# Altium PCB Button.PcbDoc
Units mil, origin at the board's own origin, x right, y up, seen from the top; angles counter-clockwise.
Board outline 640.03 x 696.02 mil, 2 copper layers (Top Layer, Bottom Layer); 4 components, 0 nets, 9 pads, 4 vias.
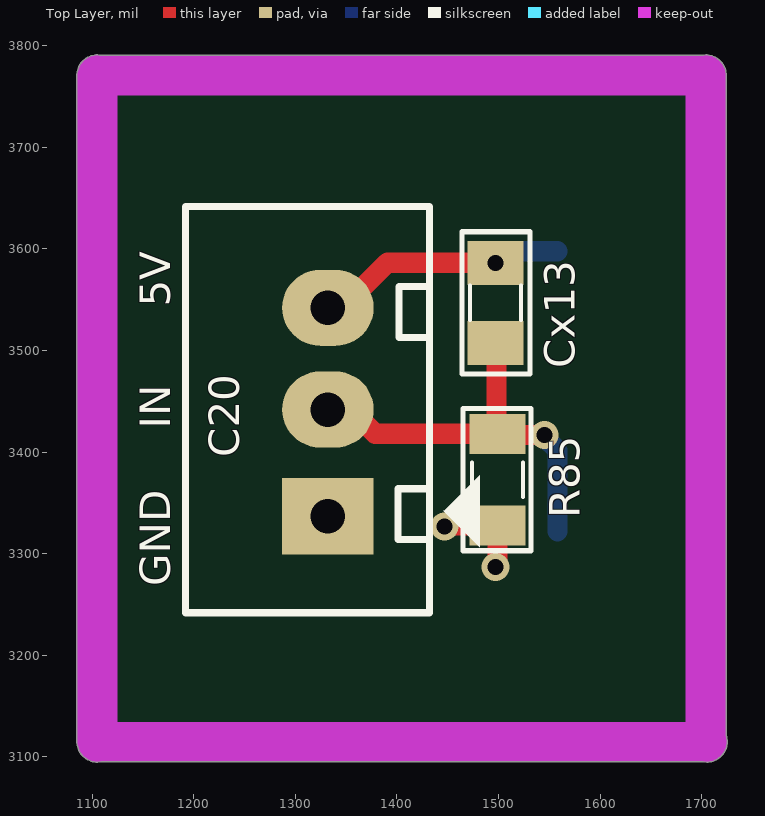
[diagram p0: Top Layer view]
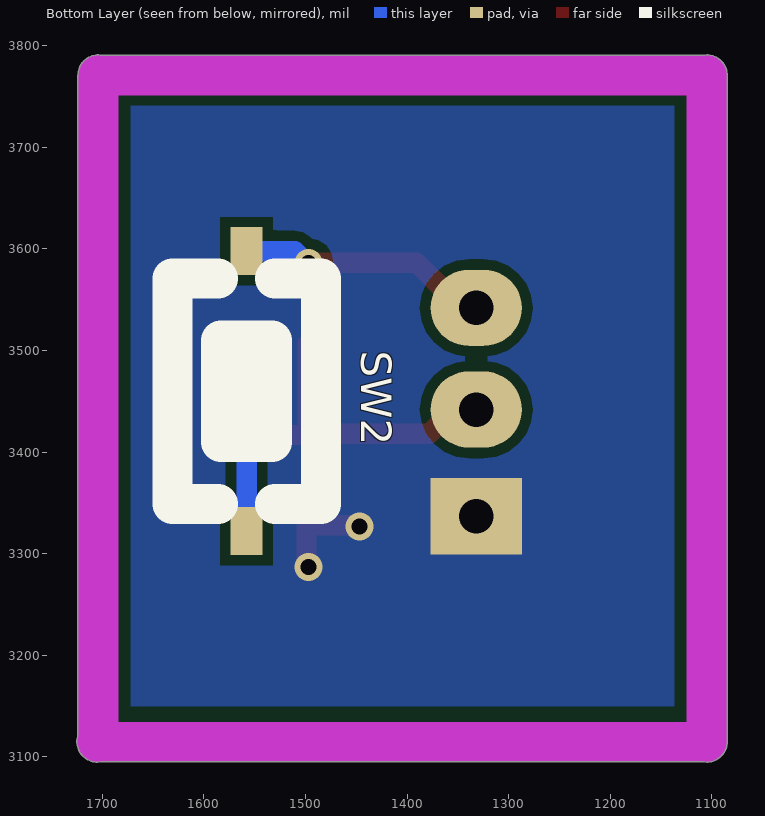
[diagram p1: Bottom Layer view, seen from below]

## Layer stack, top to bottom
Top Solder: solder mask 0.4, Solder Resist, Dk 3.5
Top Layer: signal copper 1.4
Dielectric 1: dielectric 12.6, FR-4, Dk 4.8
Bottom Layer: signal copper 1.4
Bottom Solder: solder mask 0.4, Solder Resist, Dk 3.5

## Board outline
1108.54,3095.3 cw(c1105,3115) 1084.98,3115 1084.98,3771 cw(c1105,3771) 1108.54,3790.7 1700.46,3790.7 cw(c1704,3771) 1724.02,3771 1724.02,3121.25 cw(c1705,3115) 1725.02,3115 cw(c1705,3115) 1701.46,3095.3

## Design rules (kind name [scope] priority, off if disabled: settings)
Clearance [All] p1: gap=10 ignorepadtopadclearanceinfootprint=FALSE except(0: Arc-Hole Track-Hole SMDPad-Hole THPad-Hole Via-Hole Fill-Hole Poly-Hole Region-Hole Text-Hole)
PolygonConnect [All] p1: connectstyle=Relief reliefconductorwidth=10 reliefentries=4 polygonreliefangle="90 Angle" airgapwidth=10
RoutingVias [All] p1: holewidth=28 width=50 viastyle="Through Hole" minholewidth=28 minwidth=50 maxholewidth=28 maxwidth=50
SolderMaskExpansion [All] p1: expansion=4 istentingtop=FALSE
Width [All] p1: maxlimit=10 minlimit=10 preferedwidth=10
30 further rules are at their usual default settings.

## Components (designator, comment, footprint, x,y, rotation, side; value= is the part's Value field where it differs from the comment)
C20 "Header3" Header3 1332,3342 r90 top
Cx13 "104" CN-SMD-0805 1497,3547 r90 top value=33pF
R85 "10k" RES-SMD-0805 1499,3373 r270 top
SW2 "SW" SW1-SMD 1558,3460 r90 bottom value="SW chip 2 pin"

## Footprints (in the part's own frame and the unit in brackets; to place one, negate y for a bottom-side part, rotate by r counter-clockwise, add the part's x,y. Pads: shape width x height; smd on the part's side, far side on the other; paste and mask are expansions set on the pad)
CN-SMD-0805 [mil]
  rect 43.31x55 smd paste+0 mask+4: 1(-39.36,0.01) 2(39.37,0.01)
  silkscreen extent -70,-34 70,33, body extent -39,-25 39,25, height 31
Header3 [mil] "CON 3"
  rect 75x90 hole 34 paste+0 mask+4: 1(-5,0)
  oval 75x90 hole 34 paste+0 mask+4: 2(100,0) 3(200,0)
  silkscreen extent -100,-150 300,140, body extent -95,-90 295,136, height 276
RES-SMD-0805 [mil]
  rect 39.37x55 smd paste+0 mask+4: 1(-45,0) 2(45,0)
  silkscreen extent -70,-34 70,33, body extent -39,-25 39,25, height 31
SW1-SMD [mm]
  rect 1.2x0.8 smd paste+0 mask+0: 1(-3.5,0) 2(3.5,0)
  silkscreen extent -2.82,-1.85 2.82,1.85, body extent -3.05,-1.85 3.05,1.85, height 2.5

## Part data
C20: "Header IDC, 3 x 1 Pin Vertical 2.54mm Pitch (Non-Boxed, Male)", Manufacturer="W¨¹rth Elektronik eiSos GmbH", partNo=613002143121, ComponentLink1 Description=Manufacturer, ComponentLink1URL=http://www.we-online.com, ComponentLink2 Description=Datasheet, ComponentLink2URL=http://katalog.we-online.de/em/datasheet/6130xx143121.pdf, Created by="Karrer Zheng", Created Date="29 March 2013", NoPins=02
Cx13: library part CN
R85: library part Res-SMD, "Resistor", Manufacturer="Generic Components", Class=Passive, Published=08/06/2000, Publisher="Altium Hobart Technology Centre"
SW2: library part SW2, "Switch button 2 pin"

## Via types
v1: diameter 27.56, hole 15.75, Top Layer to Bottom Layer, tented both sides, 4 vias

## Nets (pads, with @x,y where several pads share a name; then routed paths per layer and width w, separated by ;. In a path a pad name is that pad's centre, name@x,y a point inside that pad or via, vN(x,y) a via of type N, cw(c..) or ccw(c..) an arc to the next point about the centre after c; other vN are vias at no path point)
pads on no net: C20.1 C20.2 C20.3 Cx13.1 Cx13.2 R85.1 R85.2 SW2.1 SW2.2
copper on no net: | length 757.4
  Top Layer w20: 1332,3442 1354.38,3442 1378.38,3418 1499,3418 ; 1332,3542 1346.21,3542 1390.58,3586.37 v1(1496.99,3586.37) ; v1(1447,3327) 1448,3328 1499,3328 1499,3289 v1(1497,3287) ; 1496.99,3507.64 1498,3506.63 1498,3419 1499,3418 ; v1(1545,3417) 1500,3417 1499,3418
  Bottom Layer w20: v1(1496.99,3586.37) 1499.04,3586.37 1510.46,3597.8 1558,3597.8 ; v1(1545,3417) 1545,3414.95 1558,3401.95 1558,3322.2

## Polygon pours and split planes (outlines as drawn)
no net on Bottom Layer "NONET_L02_P000" (solid, remove dead copper, pour order 0): 1125,3754 1683,3754 1683,3140 1127,3140

## Keep-outs
Keep-Out Layer:
  lines w39.37: 1105,3115 1705,3115 ; 1105,3771 1704,3771
  lines w40: 1105,3115 1105,3771 ; 1704,3771 1704,3116 1705,3115

## Silkscreen, mask and mechanical layers (free items; w line width, h text height)
Top Overlay:
  text "5V" at 1177,3543 h30 r90
  text "IN" at 1177,3423 h30 r90
  text "GND" at 1177,3268 h30 r90